# Altium PCB project.PcbDoc
Units mm, origin at the board's own origin, x right, y up, seen from the top; angles counter-clockwise.
Board outline 131 x 87 mm, 2 copper layers (Top Layer, Bottom Layer); 61 components, 46 nets, 223 pads, 89 vias.
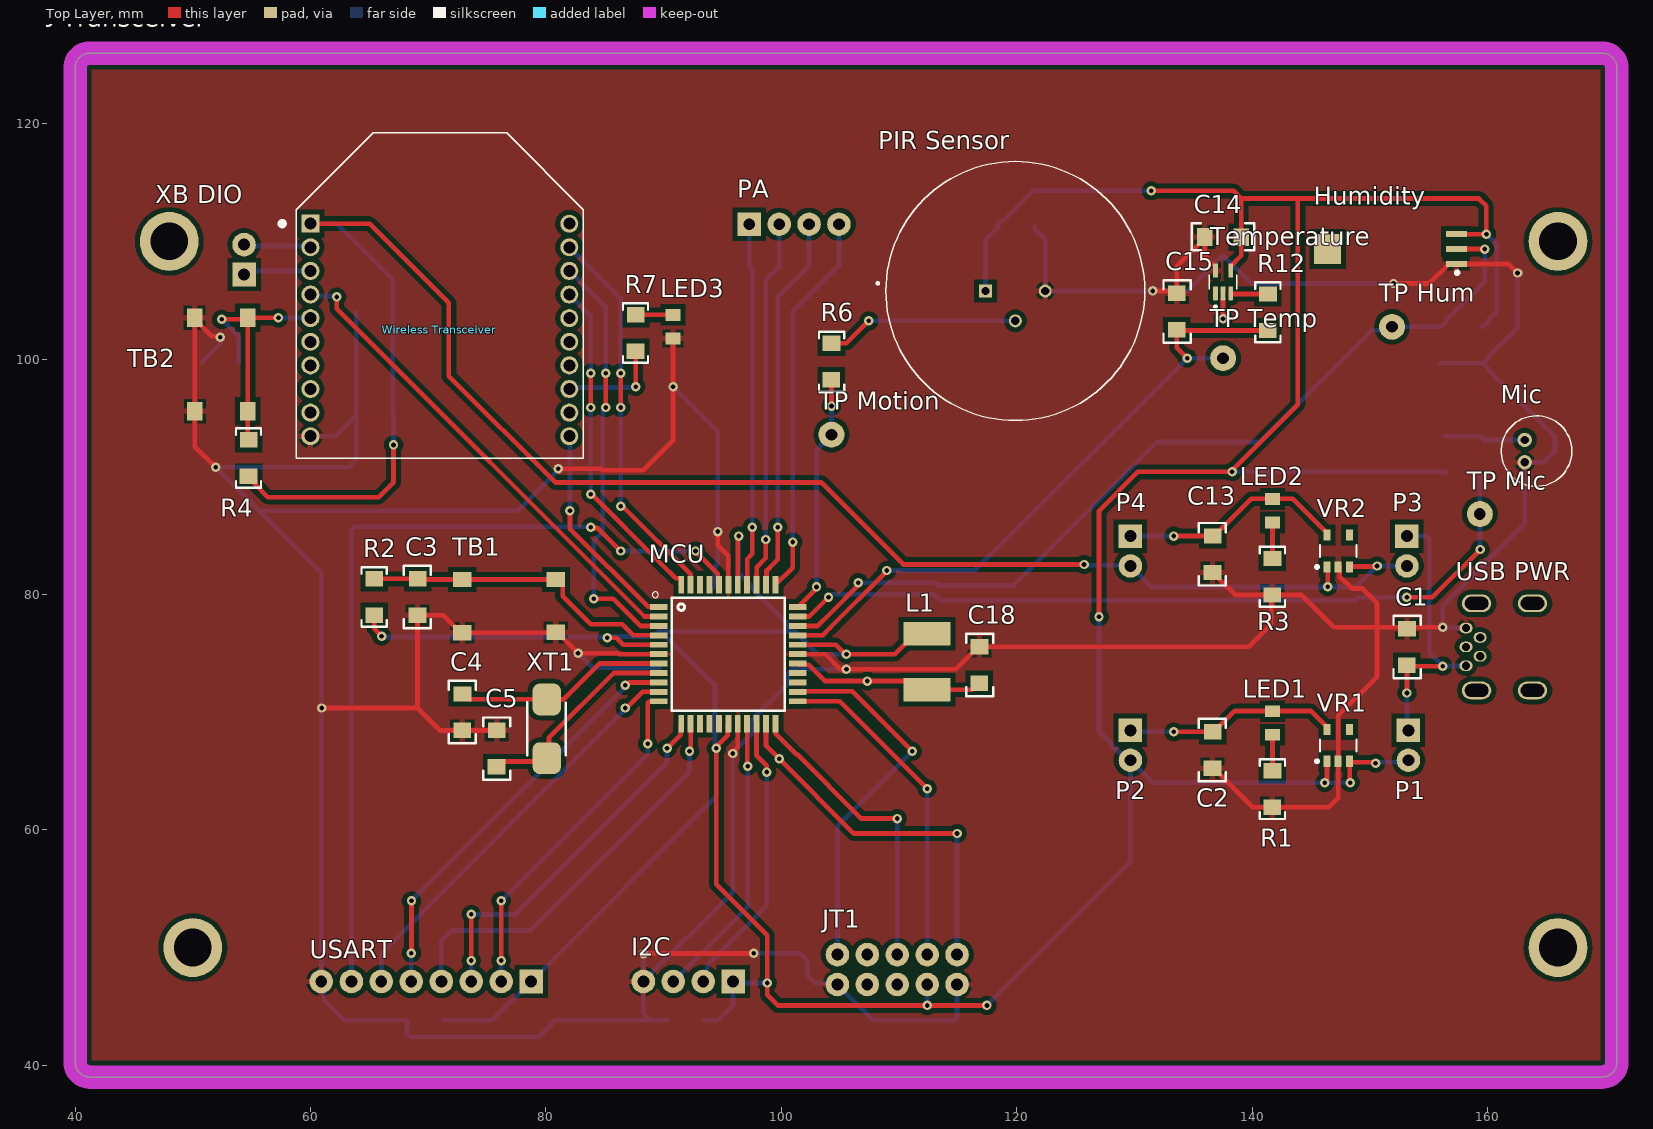
[diagram p0: Top Layer view]
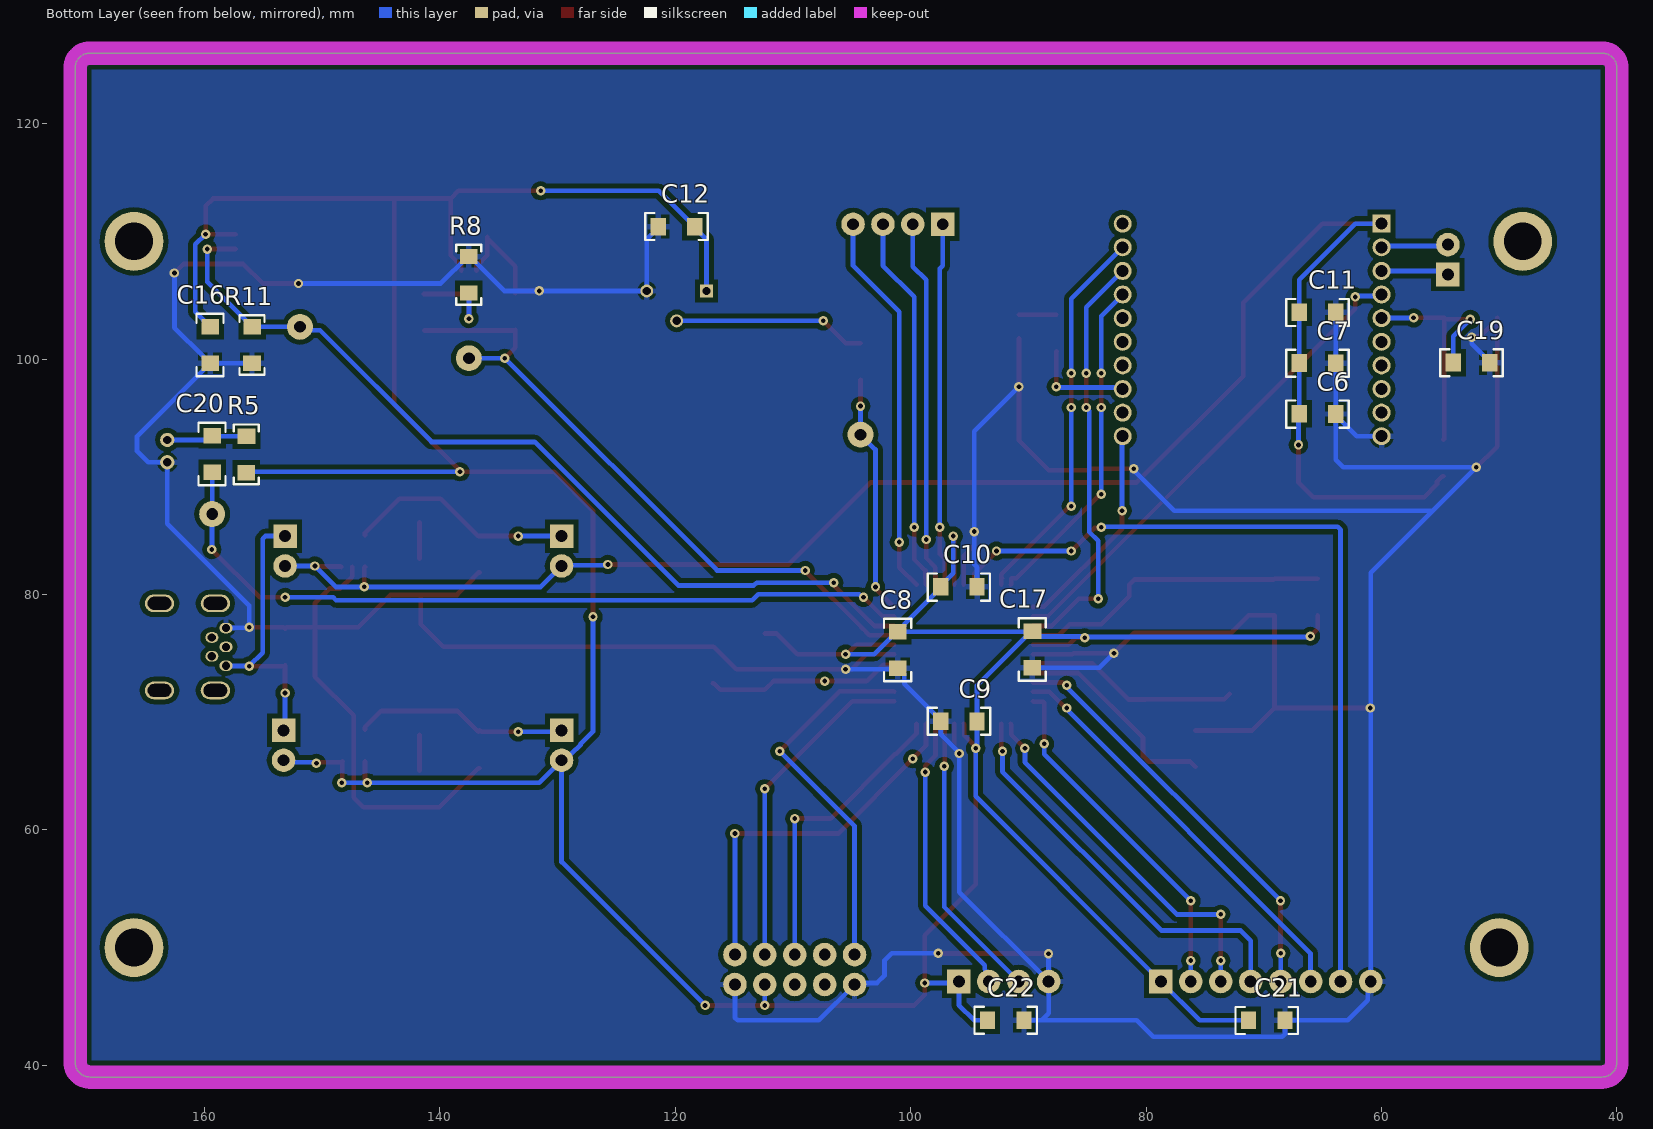
[diagram p1: Bottom Layer view, seen from below]

## Layer stack, top to bottom
Top Solder: solder mask 0.0102, Solder Resist, Dk 3.5
Top Layer: signal copper 0.0356
Dielectric 1: dielectric 0.32, FR-4, Dk 4.8
Bottom Layer: signal copper 0.0356
Bottom Solder: solder mask 0.0102, Solder Resist, Dk 3.5

## Board outline
40,40.27 40,124.73 cw(c41.27,124.73) 41.27,126 169.73,126 cw(c169.73,124.73) 171,124.73 171,40.27 cw(c169.73,40.27) 169.73,39 41.27,39 cw(c41.27,40.27)

## Design rules (kind name [scope] priority, off if disabled: settings)
Clearance Clearance_1 [WithinRoom('mcu_room') or InComponent('VR1') or InComponent('VR2') or InComponent('USB PWR') or InComponent('Temperature')] p1: gap=0.4 ignorepadtopadclearanceinfootprint=FALSE except(0.25: Arc-Arc Arc-Track Arc-SMDPad Track-Track Track-SMDPad SMDPad-SMDPad THPad-THPad)
Clearance [All] p2: gap=0.4 ignorepadtopadclearanceinfootprint=FALSE
HoleSize [All] p1: absolutevalues=TRUE maxlimit=4 minlimit=0.025 maxpercent=80.000 minpercent=20.000
MinimumSolderMaskSliver [All] p1 off: minsoldermaskwidth=0.254
PolygonConnect PolygonConnect_1 [IsVia] p1: connectstyle=Direct reliefconductorwidth=0.254 reliefentries=4 polygonreliefangle="90 Angle" airgapwidth=0.254
PolygonConnect [All] p2: connectstyle=Relief reliefconductorwidth=0.5 reliefentries=4 polygonreliefangle="90 Angle" airgapwidth=0.254
RoomDefinition mcu_room [False] p1: confinementstyle=ConfineIn formatcopy=TRUE lockcomponents=FALSE outline 87.376,82.677 104.14,82.677 104.14,66.802 87.376,66.802
RoutingVias [All] p1: holewidth=0.4 width=0.8 viastyle="Through Hole" minholewidth=0.4 minwidth=0.8 maxholewidth=0.4 maxwidth=0.8
SilkToSilkClearance [All] p1 off: silktosilkclearance=0.254
SilkToSolderMaskClearance [IsPad] p1 off: minsilkscreentomaskgap=0.254 clearancetoexposedcopper=TRUE
SolderMaskExpansion [All] p1: expansion=0.102 istentingtop=FALSE
Width [All] p1: maxlimit=1 minlimit=0.4 preferedwidth=0.4
26 further rules are at their usual default settings.

## Components (designator, comment, footprint, x,y, rotation, side; value= is the part's Value field where it differs from the comment)
C1 "1206, capacitor" "1206, capasitor" 153.124,73.416 r270 top value=100n
C2 "1206, capacitor" "1206, capasitor" 136.678,68.901 r90 top value=10u
C3 "1206, capacitor" "1206, capasitor" 69.126,81.905 r90 top value=100n
C4 "1206, capacitor" "1206, capasitor" 72.936,72.126 r90 top value=10-12p
C5 "1206, capacitor" "1206, capasitor" 75.781,64.78 r270 top value=10-12p
C6 "1206, capacitor" "1206, capasitor" 67.564,95.377 r0 bottom value=10u
C7 "1206, capacitor" "1206, capasitor" 67.564,99.695 r0 bottom value=1u
C8 "1206, capacitor" "1206, capasitor" 101.066,77.41 r90 bottom value=100n
C9 "1206, capacitor" "1206, capasitor" 93.786,69.189 r180 bottom value=100n
C10 "1206, capacitor" "1206, capasitor" 98.034,80.683 r0 bottom value=100n
C11 "1206, capacitor" "1206, capasitor" 67.564,104.013 r0 bottom value=8.2p
C12 "1206, capacitor" "1206, capasitor" 117.767,111.214 r180 bottom value=100n
C13 "1206, capacitor" "1206, capasitor" 136.678,85.538 r90 top value=10u
C14 "1206, capacitor" "1206, capasitor" 139.662,110.337 r0 top value=100n
C15 "1206, capacitor" "1206, capasitor" 133.578,101.914 r270 top value=1n
C16 "1206, capacitor" "1206, capasitor" 159.486,103.318 r90 bottom value=100n
C17 "1206, capacitor" "1206, capasitor" 89.624,77.46 r90 bottom value=100n
C18 "1206, capacitor" "1206, capasitor" 116.802,71.892 r270 top value=100n
C19 "1206, capacitor" "1206, capasitor" 54.473,99.733 r0 bottom value=100n
C20 "1206, capacitor" "1206, capasitor" 159.319,94.065 r90 bottom value=1u
C21 "1206, capacitor" "1206, capasitor" 71.872,43.853 r0 bottom value=100n
C22 "1206, capacitor" "1206, capasitor" 94.047,43.864 r0 bottom value=100n
Humidity "HIH-5030-001" HONEYWELL_HIH-5030-001 152.019,109.347 r90 top
I2C "4x1 Pin Header" padFour_L 92.075,47.117 r180 top
JT1 "JTAG Connector" Atmel_JTAG 114.963,49.393 r180 top
L1 "Coil" "1812, coil" 112.395,74.295 r270 top value=10uH
LED1 "0805, LED" 0805_led 141.76,69.088 r90 top value="0805 LED"
LED2 "0805, LED" 0805_led 141.76,87.122 r90 top value="0805 LED"
LED3 "0805, LED" 0805_led 90.83,102.759 r90 top value="0805 LED"
MCU "ATMEGA1284P-AUR" QFP80P1200X1200X120-44N 95.504,74.93 r0 top
Mic "CMC-2742PBJ-A" CUI_CMC-2742PBJ-A 164.167,92.186 r180 top
P1 "1x2 Pin Header" 1x2HEADER 153.289,68.453 r0 top
P2 "1x2 Pin Header" 1x2HEADER 129.667,68.453 r0 top
P3 "1x2 Pin Header" 1x2HEADER 153.162,84.963 r0 top
P4 "1x2 Pin Header" 1x2HEADER 129.667,84.963 r0 top
PA "4x1 Pin Header" padFour_L 101.112,111.466 r0 top
"PIR Sensor" "EKMC1603112" TO254P2200H2020-3 119.888,105.791 r0 top
R1 "1206, resistor" 1206 141.735,61.64 r270 top value=4.7k
R2 "1206, resistor" 1206 65.402,81.616 r90 top value=10k
R3 "1206, resistor" 1206 141.735,79.674 r270 top value=4.7k
R4 "1206, resistor" 1206 54.734,93.427 r90 top value=10k
R5 "1206, resistor" 1206 156.45,93.727 r90 bottom value=2.2k
R6 "1206, resistor" 1206 104.27,97.962 r270 top value=33k
R7 "1206, resistor" 1206 87.616,104.045 r90 top value=1.2k
R8 "1206, resistor" 1206 137.555,108.998 r90 bottom value=0R
R11 "1206, resistor" 1206 155.97,103.029 r90 bottom value=65k
R12 "1206, resistor" 1206 141.354,102.153 r270 top value=1k
TB1 "Tactile Button" "Button smd" 80.848,76.78 r180 top value="Button SMD"
TB2 "Tactile Button" "Button smd" 50.177,95.567 r90 top value="Button SMD"
Temperature "LMT88DCKR" SOT65P210X110-5N 137.541,106.553 r90 top
"TP Hum" "Test Point" testPoint 151.892,102.743 r90 top value="Test point"
"TP Mic" "Test Point" testPoint 159.357,86.836 r270 top value="Test point"
"TP Motion" "Test Point" testPoint 104.267,93.582 r180 top value="Test point"
"TP Temp" "Test Point" testPoint 137.541,100.076 r90 top value="Test point"
USART "1x8 Pin Header" "1x8 Pin HEader" 78.74,47.092 r180 top
"USB PWR" "USB Mini Connector" "USB Mini TH" 159.08,79.248 r270 top
VR1 "3.3V Reg" SOT23-5 147.32,67.183 r90 top value=TPS79333DBVR
VR2 "" SOT23-5 147.32,83.693 r90 top value=TPS79333DBVR
"Wireless Transceiver" "XB3-24Z8PT-J" XCVR_XB3-24Z8PT-J 70.993,105.41 r0 top
"XB DIO" "1x2 Pin Header" padtwo_L 54.356,107.188 r180 top
XT1 "XTAL TXC 7A" XTAL_SMD_LP 80.071,71.095 r270 top value=Crystal

## Footprints (in the part's own frame and the unit in brackets; to place one, negate y for a bottom-side part, rotate by r counter-clockwise, add the part's x,y. Pads: shape width x height; smd on the part's side, far side on the other; paste and mask are expansions set on the pad)
1x2HEADER [mm] "Pad Diameter 2 mm, Hole  1 mm, Pitch 2.54 mm"
  rect 2x2 hole 1: 1(0,0)
  round 2 hole 1: 2(0,-2.54)
  body extent -1.27,-3.81 1.27,1.27, height 5.94
"1x8 Pin HEader" [mm]
  rect 2x2 hole 1: 1(0,-0.025)
  round 2 hole 1: 2(2.54,-0.025) 3(5.08,-0.025) 4(7.62,-0.025) 5(10.18,-0.025) 6(12.72,-0.025) 7(15.26,-0.025) 8(17.82,-0.025)
  body extent -1.27,-1.24 19.05,1.24, height 8.54
0805_led [mm]
  rect 1x1.25 smd: 0(-1,0.025) 1(1,0.025)
  body extent -1.03,-0.6 0.99,0.65, height 1.1
1206 [mm] "Generic 1206"
  rect 1.3x1.5 smd: 0(-3.384,-0.003) 1(-0.286,-0.014)
  silkscreen extent -4.37,-1.07 0.71,1.07, body extent -3.46,-0.79 -0.26,0.81
"1206, capasitor" [mm] "Generic 1206"
  rect 1.3x1.5 smd: 0(-3.673,0.038) 1(-0.575,0.026)
  silkscreen extent -4.78,-1.1 0.53,1.2, body extent -3.78,-0.79 -0.58,0.81
"1812, coil" [mm]
  rect 2x4 smd: 1(-2.385,0) 2(2.385,0)
  body extent -2.3,-1.6 2.3,1.6, height 2.6
Atmel_JTAG [mm]
  round 2 hole 1: 1(0.028,-0.01) 2(0.028,2.53) 3(2.568,-0.01) 4(2.568,2.53) 5(5.108,-0.01) 6(5.108,2.53) 7(7.648,-0.01) 8(7.648,2.53) 9(10.188,-0.01) 10(10.188,2.53)
  body extent -1.15,-1.36 11.55,3.64, height 8.6
"Button smd" [mm]
  rect 1.55x1.3 smd: 1(0,0) 2(0,-4.5) 3(7.95,0.023) 4(7.95,-4.5)
  body extent -0.55,-5.25 8.45,0.75, height 4.3
CUI_CMC-2742PBJ-A [mm]
  round 1.208 hole 0.7: GND(1,0.95) OUT(1,-0.95)
  silkscreen extent -3,-3 3,3
HONEYWELL_HIH-5030-001 [mm]
  rect 0.51x1.78 smd: 1(-1.27,-5.335) 2(0,-5.335) 3(1.27,-5.335)
  rect 2.54x2.29 smd: 4(0,5.59)
  silkscreen extent -2.14,-5.54 -1.86,-5.26
padFour_L [mm] "Pad Diameter 2 mm, Hole  0.3 mm, Pitch 2.54 mm"
  rect 2x2 hole 1: 1(-3.83,0)
  round 2 hole 1: 2(-1.29,0) 3(1.25,0) 4(3.79,0)
  body extent -5.1,-1.42 5.06,1.5, height 8.51
padtwo_L [mm] "Pad Diameter 2 mm, Hole  0.3 mm, Pitch 2.54 mm"
  rect 2x2 hole 1: 1(0,0)
  round 2 hole 1: 2(0,-2.54)
  body extent -1.46,-3.81 1.46,1.27, height 8.51
QFP80P1200X1200X120-44N [mm]
  rect 1.5x0.5 smd: 1(-5.9,4) 2(-5.9,3.2) 3(-5.9,2.4) 4(-5.9,1.6) 5(-5.9,0.8) 6(-5.9,0) 7(-5.9,-0.8) 8(-5.9,-1.6) 9(-5.9,-2.4) 10(-5.9,-3.2) 11(-5.9,-4) 23(5.9,-4) 24(5.9,-3.2) 25(5.9,-2.4) 26(5.9,-1.6) 27(5.9,-0.8) 28(5.9,0) 29(5.9,0.8) 30(5.9,1.6) 31(5.9,2.4) 32(5.9,3.2) 33(5.9,4)
  rect 0.5x1.5 smd: 12(-4,-5.9) 13(-3.2,-5.9) 14(-2.4,-5.9) 15(-1.6,-5.9) 16(-0.8,-5.9) 17(0,-5.9) 18(0.8,-5.9) 19(1.6,-5.9) 20(2.4,-5.9) 21(3.2,-5.9) 22(4,-5.9) 34(4,5.9) 35(3.2,5.9) 36(2.4,5.9) 37(1.6,5.9) 38(0.8,5.9) 39(0,5.9) 40(-0.8,5.9) 41(-1.6,5.9) 42(-2.4,5.9) 43(-3.2,5.9) 44(-4,5.9)
  silkscreen extent -6.45,-4.8 4.8,5.3
SOT23-5 [mm] "SOT23, 5-Leads, Body 2,90x2,80mm, Pitch 0,95mm, IPC Medium Density"
  rect 0.95x0.6 smd: 1(-1.35,0.95) 2(-1.35,0) 3(-1.35,-0.95) 4(1.35,-0.95) 5(1.35,0.95)
  silkscreen extent -1.47,-1.55 0.5,1.92, body extent -1.25,-1.5 1.25,1.5, height 1.1
SOT65P210X110-5N [mm]
  rrect25% 1.19x0.4 smd: 1(-0.96,0.65) 2(-0.96,0) 3(-0.96,-0.65) 4(0.96,-0.65) 5(0.96,0.65)
  silkscreen extent -2.2,-1.17 0.63,1.17
testPoint [mm] "Diameter 2mm, Hole 0.3mm"
  round 2.2 hole 1: 0(0,0)
  body extent -1.27,-1.31 1.27,1.32, height 4.36
TO254P2200H2020-3 [mm]
  rect 1.1x1.1 hole 0.7: 1(-2.54,0)
  round 1.1 hole 0.7: 2(0,-2.54) 3(2.54,0)
  silkscreen extent -11.78,-11 11,11
"USB Mini TH" [mm]
  oval 0.9x1.1 hole 0.7: 1(5.3,-0.9) 2(4.5,0.3) 3(3.7,-0.9) 4(2.9,0.3) 5(2.1,-0.9)
  oval 1.5x2.5 hole 1.1 slot 2 at 90 deg: 6(0,4.75) 6(0,0) 6(7.4,4.75) 6(7.4,0)
  body extent -0.37,-1.02 7.78,7.8, height 3.95
XCVR_XB3-24Z8PT-J [mm]
  rect 1.53x1.53 hole 1.02: 1(-10.998,6.096)
  round 1.53 hole 1.02: 2(-10.998,4.089) 3(-10.998,2.083) 4(-10.998,0.076) 5(-10.998,-1.93) 6(-10.998,-3.937) 7(-10.998,-5.944) 8(-10.998,-7.95) 9(-10.998,-9.957) 10(-10.998,-11.963) 11(10.998,-11.963) 12(10.998,-9.957) 13(10.998,-7.95) 14(10.998,-5.944) 15(10.998,-3.937) 16(10.998,-1.93) 17(10.998,0.076) 18(10.998,2.083) 19(10.998,4.089) 20(10.998,6.096)
  silkscreen extent -13.6,-13.82 12.19,13.82
XTAL_SMD_LP [mm] "Pad 1.7x2.4, Pitch 3.7"
  rrect50% 2.7x2.4 smd: 1(0.02,0) 2(5,0)
  silkscreen extent 0.26,-1.66 4.76,1.62, body extent 0.02,-1.6 5.02,1.6, height 1.35

## Part data
Humidity: "Humidity Temperature Sensor 0 ~ 100% RH Analog Voltage Â±3% RH 5s Surface Mount", Package="Housed Sensor Honeywell Sensing", Digi-Key_Part_Number=480-3294-1-ND, Digi-Key_Purchase_URL=https://www.digikey.com/product-detail/en/honeywell-sensing-and-productivity-solutions/HIH-5030-001/480-3294-1-ND/2061078?utm_source=snapeda&utm_medium=aggregator&utm_campaign=symbol, MF="Honeywell Sensing", MP=HIH-5030-001, SnapEDA_Link=https://www.snapeda.com/parts/HIH-5030-001/Honeywell%20Sensing%20and%20Productivity%20Solutions/view-part/269223/?ref=snap
I2C PA: library part "1x4 Pin Header", "2.54 mm"
JT1: library part "Atmel JTAG", "Atmel JTAG Connector"
MCU: "AVR AVRÂ® ATmega Microcontroller IC 8-Bit 20MHz 128KB (64K x 16) FLASH 44-TQFP (10x10)", Package="TQFP-44 Microchip", Availability=Warning, MF=Microchip, Mouser-Purchase-URL=https://snapeda.com/shop?store=Mouser&id=1775205, MP=ATMEGA1284P-AUR, Price=None, SnapEDA_Link=https://www.snapeda.com/parts/ATMEGA1284P-AUR/Microchip/view-part/1775205/?ref=snap
Mic: "6.0 mm, Omnidirectional, PCB Mount, 2.0 Vdc, Electret Condenser Microphone", Package=None, Availability=Unavailable, MP=CMC-2742PBJ-A, Price=None
P1 P2 P3 P4 "XB DIO": "2.54 mm, TH"
"PIR Sensor": "Sensor PIR _Passive Infrared_ 472 _12m_ 39.4' Polyethylene, Black Lens", Package="- Panasonic Electric", Availability=Unavailable, MF="Panasonic Electric", MP=EKMC1603112, Price=None, SnapEDA_Link=https://www.snapeda.com/parts/EKMC1603112/Panasonic%20Electric%20Works/view-part/82446/?ref=snap
R1 R2 R3 R4 R5 R6 R7 R8 R11 R12: "Resistor"
TB1 TB2: library part "Button SMD", "Tactile Switch Small Low", ELFA=110-87-406
Temperature: "&plusmn;4&deg;C analog output temperature sensor, with -11.77mV/&deg;C gain 5-SC70 -55 to 130", Package=None, Availability=Unavailable, MP=LMT88DCKR, Price=None
USART: "2.54 mm"
VR1: library part TPS79333DBR, "3.3V Reg, Ultra-Low Noise, 200 mA", Input Voltage="Vin 6V (max)", Drop Out=102mV, Farnell=1287689
VR2: library part TPS79333DBR, "3.3V Reg, Ultra-Low Noise, 200 mA", Drop Out=102mV, Farnell=1287689
"Wireless Transceiver": "802.15.4 ZigbeeÂ® Transceiver Module 2.4GHz Integrated, Trace Through Hole", Package="Module Digi International", Digi-Key_Part_Number=602-2188-ND, Digi-Key_Purchase_URL=https://www.digikey.ch/product-detail/en/digi/XB3-24Z8PT-J/602-2188-ND/8130934?utm_source=snapeda&utm_medium=aggregator&utm_campaign=symbol, MF="Digi International", MP=XB3-24Z8PT-J, SnapEDA_Link=https://www.snapeda.com/parts/XB3-24Z8PT-J/Digi%20International/view-part/2751315/?ref=snap
XT1: "16 MHz, SMD, 5mm x 3,2mm, 30 ppm", Farnell=1841946
"TP Hum" "TP Mic" "TP Motion" "TP Temp": Farnell=1702006
"USB PWR": Farnell=1125348

## Free pads (board coordinates)
  round 5 hole 3.2: 2(48,110) 2(50,50) 2(166,50) 2(166,110)

## Via types
v1: diameter 0.8, hole 0.4, Top Layer to Bottom Layer, 89 vias

## Nets (pads, with @x,y where several pads share a name; then routed paths per layer and width w, separated by ;. In a path a pad name is that pad's centre, name@x,y a point inside that pad or via, vN(x,y) a via of type N, cw(c..) or ccw(c..) an arc to the next point about the centre after c; other vN are vias at no path point)
3V3: "PIR Sensor.1" C8.1 C9.1 C10.1 C12.1 C14.1 C16.1 C17.1 C21.1 C22.1 Humidity.3 I2C.1 JT1.4 L1.1 MCU.5 MCU.17 MCU.29 MCU.38 P1.2 P2.2 R2.0 R5.0 Temperature.4 USART.1 VR1.1 VR1.3 | length 377.1
  Top Layer w0.4: R2.0 65.405,77.089 v1(66.04,76.454) ; v1(85.217,76.327) 85.979,76.327 86.576,75.73 87.376,75.73 MCU.5 ; MCU.17 95.454,68.98 95.454,68.038 94.488,67.072 v1(94.488,66.929) 94.488,55.372 98.806,51.054 v1(98.806,46.99) 98.806,45.974 99.695,45.085 v1(112.395,45.085) v1(117.475,45.085) ; MCU.38 96.304,84.874 v1(96.393,84.963) ; MCU.29 104.14,75.73 104.61,75.73 105.333,75.007 105.46,75.007 v1(105.537,74.93) 109.645,74.93 111.395,76.68 L1.1 ; v1(127,78.105) 127,87.122 130.302,90.424 v1@138.176,90.424 ; v1(131.445,114.3) 138.43,114.3 139.086,113.644 ; Temperature.4 138.191,107.908 139.086,108.803 C14.1 139.086,113.644 ; v1@138.239,90.487 143.891,96.139 143.891,113.644 ; v1(146.177,64.008) 146.37,64.201 VR1.1 ; VR1.3 VR1.3@148.303,65.8 ; v1(148.336,64.008) 148.303,64.041 VR1.3@148.303,65.8 ; v1(150.495,65.659) 150.418,65.736 148.367,65.736 VR1.3@148.303,65.8 ; Humidity.3 v1(159.914,110.617) 159.893,110.638 159.893,113.03 159.279,113.644 143.891,113.644 ; 139.086,113.644 143.891,113.644
  Bottom Layer w0.4: v1(66.04,76.454) 66.103,76.391 85.153,76.391 v1(85.217,76.327) 85.325,76.327 85.433,76.435 89.201,76.435 C17.1 89.701,76.835 C17.1@89.801,76.835 ; C21.1 75.449,43.826 USART.1 94.488,62.865 v1(94.488,66.929) 94.361,67.056 C9.1 94.361,72.275 C17.1@89.801,76.835 ; C22.1 93.494,43.815 94.615,43.815 95.905,45.105 I2C.1 96.032,46.99 v1(98.806,46.99) ; v1(96.393,84.963) 96.393,81.822 97.459,80.756 C10.1 97.459,80.556 100.542,77.473 100.542,77.285 C8.1@100.992,76.835 ; v1(105.537,74.93) 103.097,74.93 101.192,76.835 C8.1 C8.1@100.992,76.835 ; v1(112.395,45.085) JT1.4 ; 117.348,105.791 117.348,110.146 118.343,111.141 118.441,111.141 C12.1@118.441,111.241 ; v1(117.475,45.085) 129.667,57.277 P2.2 ; C12.1 118.343,111.341 118.793,111.791 118.893,111.791 121.402,114.3 v1(131.445,114.3) ; v1(127,78.105) 127,68.326 128.067,67.259 128.067,67.204 128.418,66.853 128.473,66.853 129.413,65.913 P2.2 ; v1(138.303,90.424) 156.365,90.424 R5.0 ; v1(148.336,64.008) v1(146.177,64.008) 131.572,64.008 P2.2 ; v1(150.495,65.659) 150.572,65.736 153.112,65.736 P1.2 ; C16.1 159.612,102.743 160.062,103.193 160.062,103.293 160.782,104.013 160.782,109.749 v1(159.914,110.617) ; C17.1@89.801,76.835 C8.1@100.992,76.835
GND: "PIR Sensor.3" "USB PWR.5" "Wireless Transceiver.10" C1.0 C2.0 C3.0 C4.0 C5.0 C6.0 C7.0 C8.0 C9.0 C10.0 C11.0 C12.0 C13.0 C14.0 C15.0 C16.0 C17.0 C18.0 C19.0 C21.0 C22.0 Humidity.1 I2C.4 JT1.2 JT1.10 LED3.0 MCU.6 MCU.18 MCU.28 MCU.39 Mic.GND R1.1 R3.1 R8.1 R11.0 TB1.1 TB1.3 TB2.1 TB2.3 Temperature.5 USART.8 VR1.2 VR2.2 | length 537.6
  Top Layer w0.4: TB2.3 50.155,103.392 TB2.3@50.177,103.37 ; v1(51.943,90.805) 50.177,92.571 TB2.1 TB2.3@50.177,103.37 ; v1(52.324,101.854) 52.247,101.931 51.616,101.931 TB2.3@50.177,103.37 ; v1(60.96,70.358) 69.088,70.358 ; C5.0 C4.0 70.993,68.453 69.088,70.358 ; v1(81.042,90.679) 84.644,90.679 84.772,90.551 88.265,90.551 90.805,93.091 v1(90.805,97.663) LED3.0 ; v1(88.294,49.476) 88.321,49.503 97.636,49.503 v1(97.663,49.53) ; MCU.6 87.376,74.93 86.245,74.93 86.157,75.018 v1(82.735,75.018) 80.995,76.757 TB1.3 72.773,76.757 71.298,78.232 C3.0 69.088,70.358 ; v1(94.615,85.344) 94.615,84.201 95.504,83.312 MCU.39 ; v1(95.885,66.489) 95.962,66.565 95.962,66.684 96.08,66.802 96.304,67.026 MCU.18 ; MCU.28 103.759,74.93 105.029,73.66 v1(105.537,73.66) 114.835,73.66 116.74,75.565 C18.0 139.713,75.565 141.621,77.473 R3.1@141.621,79.96 ; v1(131.572,105.791) 133.411,105.791 C15.0 133.615,107.9 C14.0@135.989,110.274 ; C14.0 C14.0@135.989,110.274 ; C2.0 136.741,65.228 140.043,61.926 R1.1 146.508,61.926 147.32,62.738 VR1.2 147.32,69.723 150.622,73.025 150.622,77.216 ; C13.0 136.741,81.865 137.191,81.415 137.191,81.324 138.555,79.96 R3.1@141.621,79.96 ; Temperature.5 136.891,107.908 135.989,108.81 C14.0@135.989,110.274 ; VR2.2@147.447,82.343 147.454,82.336 147.454,81.527 148.463,80.518 149.352,80.518 149.773,80.097 149.773,80.092 150.622,79.243 150.622,77.216 ; v1(152.019,106.426) 155.068,106.426 156.719,108.077 Humidity.1 161.798,108.077 v1(162.56,107.315) ; v1(156.21,77.216) 153.289,77.216 C1.0 153.035,77.216 150.622,77.216 ; R3.1@141.621,79.96 144.195,79.96 146.939,77.216 150.622,77.216
  Bottom Layer w0.4: C19.0 50.8,99.795 52.324,101.319 v1(52.324,101.854) ; 59.995,93.447 62.098,93.447 C6.0@63.881,95.23 ; C11.0 C7.0 C6.0 63.891,95.239 C6.0@63.881,95.23 ; v1(81.042,90.679) 81.042,90.567 77.597,87.122 55.626,87.122 ; v1(82.735,75.018) 83.966,73.787 C17.0 ; v1(88.294,49.476) 88.29,49.472 I2C.4@88.29,47.122 ; v1(90.805,97.663) 94.615,93.853 v1(94.615,85.344) 94.615,82.55 94.361,82.296 C10.0 ; v1(97.663,49.53) 101.6,49.53 102.235,48.895 102.235,47.625 102.87,46.99 104.648,46.99 JT1.10 107.823,43.815 114.701,43.815 114.935,44.049 JT1.2 ; v1(105.537,73.66) 101.18,73.66 C8.0 101.003,73.737 100.553,73.287 100.553,72.42 97.459,69.326 C9.0 97.447,69.215 97.447,68.11 95.885,66.548 95.885,54.717 I2C.4@88.29,47.122 ; C12.0@121.539,111.252 121.539,111.053 122.428,110.164 122.428,105.791 v1(131.572,105.791) 134.52,105.791 137.441,108.712 R8.1 137.641,108.712 139.927,106.426 v1(152.019,106.426) ; R11.0 C16.0 C16.0@159.623,99.645 ; v1@156.21,77.182 158.146,77.182 158.18,77.148 ; v1(156.21,77.216) 156.21,79.057 163.167,86.015 Mic.GND 164.788,91.236 165.735,92.182 165.735,93.433 160.073,99.095 160.073,99.195 C16.0@159.623,99.645 ; v1(162.56,107.315) 162.56,102.682 160.073,100.195 160.073,100.095 C16.0@159.623,99.645 ; 55.626,87.122 60.92,81.828 60.92,70.358 USART.8 61.163,46.874 61.163,45.517 62.865,43.815 C21.0 68.199,42.652 68.433,42.418 79.39,42.418 80.787,43.815 88.889,43.815 90.363,43.815 C22.0 88.889,43.826 88.285,44.43 I2C.4 I2C.4@88.29,47.122 ; 55.626,87.122 v1(51.943,90.805) 63.246,90.805 63.881,91.44 C6.0@63.881,95.23
Humidity: "TP Hum.0" Humidity.2 MCU.31 R11.1 | length 76.1
  Top Layer w0.4: MCU.31 103.111,77.33 104.14,78.359 106.553,80.772 v1(106.553,81.01) ; Humidity.2 v1(159.766,109.347)
  Bottom Layer w0.4: v1(106.553,81.01) 113.092,81.01 113.33,80.772 119.761,80.772 131.953,92.964 140.716,92.964 150.192,102.44 151.589,102.44 151.892,102.743 R11.1 156.056,102.743 156.506,103.193 156.506,103.293 159.766,106.553 v1(159.766,109.347)
Mic: "TP Mic.0" C20.0 MCU.32 | length 67.3
  Top Layer w0.4: MCU.32 102.387,78.13 v1(104.013,79.756) ; v1(153.162,79.756) 155.321,79.756 v1(159.385,83.82)
  Bottom Layer w0.4: v1(104.013,79.756) 104.121,79.756 104.14,79.775 104.375,80.01 112.961,80.01 113.469,79.502 148.832,79.502 149.086,79.756 v1(153.162,79.756) ; C20.0 159.357,86.836 159.371,86.822 159.371,83.834 v1(159.385,83.82)
Motion: "TP Motion.0" MCU.33 R6.1 | length 20.5
  Top Layer w0.4: MCU.33 102.997,80.523 v1(102.997,80.645) ; R6.1 104.267,98.237 v1(104.267,96.012)
  Bottom Layer w0.4: v1(102.997,80.645) 102.997,92.312 104.267,93.582 104.267,93.599 v1(104.267,96.012)
NetC1_1: "USB PWR.1" C1.1 P1.1 P3.1 | length 24
  Top Layer w0.4: C1.1 C1.1@153.162,73.98 ; v1(153.162,71.628) C1.1@153.162,73.98 ; v1(156.21,73.914) 153.228,73.914 C1.1@153.162,73.98
  Bottom Layer w0.4: v1(153.162,71.628) 153.162,68.58 P1.1 ; P3.1 154.833,84.963 155.067,84.729 155.067,75.057 v1@156.193,73.931 ; v1(156.21,73.914) v1@156.193,73.931 ; 158.18,73.948 158.163,73.931 v1@156.193,73.931
NetC2_1: C2.1 LED1.1 P2.1 VR1.5 | length 18.4
  Top Layer w0.4: v1(133.35,68.326) 136.498,68.326 136.625,68.453 136.752,68.326 138.53,70.104 141.719,70.104 LED1.1 141.751,70.104 144.974,70.104 146.37,68.708 VR1.5
  Bottom Layer w0.4: P2.1 129.794,68.326 v1(133.35,68.326)
NetC13_1: C13.1 LED2.1 P4.1 VR2.5 | length 19.4
  Top Layer w0.4: v1(133.35,84.963) C13.1 136.752,84.963 139.927,88.138 143.45,88.138 146.37,85.218 VR2.5
  Bottom Layer w0.4: P4.1 v1(133.35,84.963)
NetC18_1: C18.1 L1.2 MCU.27 | length 16.6
  Top Layer w0.4: MCU.27 101.504,74.03 102.34,74.03 103.726,72.644 v1(107.315,72.644) 111.661,72.644 L1.2 116.172,71.91 116.729,72.467 C18.1
NetC20_1: C20.1 Mic.OUT R5.1 | length 6.9
  Bottom Layer w0.4: R5.1 159.296,93.44 C20.1 159.7,93.136 Mic.OUT
NetLED1_0: LED1.0 R1.0 | length 3.1
  Top Layer w0.4: R1.0 141.735,65.027 LED1.0
NetLED2_0: LED2.0 R3.0 | length 3.1
  Top Layer w0.4: R3.0 141.735,83.061 LED2.0
NetLED3_1: LED3.1 R7.1 | length 3.2
  Top Layer w0.4: R7.1 LED3.1
"NetPIR Sensor_2": "PIR Sensor.2" R6.0 | length 16.6
  Top Layer w0.4: R6.0 105.537,101.346 v1(107.442,103.251)
  Bottom Layer w0.4: v1@107.505,103.188 v1(107.442,103.251) 119.888,103.251 119.825,103.188
NetR8_0: R8.0 Temperature.2 | length 3.8
  Top Layer w0.4: v1(137.541,103.439) Temperature.2@137.541,105.071
  Bottom Layer w0.4: v1(137.541,103.439) 137.541,105.603 R8.0
NetR12_0: R12.0 Temperature.3 | length 3.2
  Top Layer w0.4: Temperature.3 138.191,105.537 R12.0
PA0: MCU.37 PA.1 | length 30.9
  Top Layer w0.4: MCU.37 97.104,83.016 97.536,83.448 97.536,84.328 v1(97.536,85.725)
  Bottom Layer w0.4: PA.1 97.282,107.95 97.536,107.696 v1(97.536,85.725)
PA1: MCU.36 PA.2 | length 31.4
  Top Layer w0.4: MCU.36 97.904,81.661 97.917,81.674 97.917,82.326 98.692,83.101 v1(98.692,84.671)
  Bottom Layer w0.4: v1(98.692,84.671) 98.692,106.723 99.822,107.854 PA.2
PA2: MCU.35 PA.3 | length 32.2
  Top Layer w0.4: MCU.35 98.704,81.33 98.754,81.38 98.754,82.032 99.399,82.677 99.695,82.973 v1(99.695,85.725)
  Bottom Layer w0.4: v1(99.695,85.725) 99.695,105.283 102.362,107.95 PA.3
PA3: MCU.34 PA.4 | length 32.9
  Top Layer w0.4: MCU.34 100.965,82.291 v1(100.965,84.455)
  Bottom Layer w0.4: v1(100.965,84.455) 100.965,104.013 104.902,107.95 PA.4
RESET: C3.1 MCU.4 R2.1 TB1.2 TB1.4 | length 26.7
  Top Layer w0.4: R2.1 C3.1 69.149,81.28 TB1.4 TB1.2 80.973,81.28 81.423,80.83 81.423,79.867 83.82,77.47 86.488,77.47 87.428,76.53 MCU.4
SCL: I2C.3 MCU.19 | length 24.6
  Top Layer w0.4: MCU.19 97.104,66.802 97.104,65.456 v1(97.155,65.405)
  Bottom Layer w0.4: I2C.3 97.155,53.447 v1(97.155,65.405)
SDA: I2C.2 MCU.20 | length 24.5
  Top Layer w0.4: MCU.20 97.904,66.802 97.904,66.307 98.768,65.443 v1(98.768,64.91)
  Bottom Layer w0.4: I2C.2 93.671,47.423 93.671,48.123 93.699,48.151 93.699,48.487 98.768,53.556 v1(98.768,64.91)
SPI_ATN: "Wireless Transceiver.19" MCU.43 | length 33.1
  Top Layer w0.4: v1(86.36,87.503) 86.437,87.426 86.595,87.426 92.304,81.717 MCU.43@92.304,81.33 ; v1(86.36,95.885) v1(86.36,98.806) ; MCU.43@92.254,81.38 MCU.43@92.304,81.33 ; MCU.43 MCU.43@92.304,81.33
  Bottom Layer w0.4: 81.991,109.499 86.36,105.131 v1(86.36,98.806) ; v1(86.36,87.503) v1(86.36,95.885)
SPI_CLK: "Wireless Transceiver.18" MCU.3 | length 36.1
  Top Layer w0.4: v1(84.074,79.629) 85.725,79.629 88.024,77.33 MCU.3 ; v1(85.09,95.885) v1(85.09,98.806)
  Bottom Layer w0.4: 81.991,107.493 85.09,104.394 v1(85.09,98.806) ; v1(84.074,79.629) 84.074,84.565 84.82,85.311 84.82,95.615 v1(85.09,95.885)
SPI_MISO: "Wireless Transceiver.4" MCU.2 | length 41.5
  Top Layer w0.4: v1(62.23,105.283) 62.23,104.279 88.379,78.13 MCU.2
  Bottom Layer w0.4: 59.995,105.486 60.121,105.36 62.153,105.36 v1(62.23,105.283)
SPI_MOSI: "Wireless Transceiver.11" MCU.1 | length 18.2
  Top Layer w0.4: v1(82.042,87.122) 82.042,85.598 88.685,78.955 89.579,78.955 MCU.1
  Bottom Layer w0.4: 81.991,93.447 82.042,93.396 v1(82.042,87.122)
SPI_SEL: "Wireless Transceiver.17" MCU.44 | length 28.9
  Top Layer w0.4: v1(83.82,88.519) 83.883,88.519 89.725,82.677 91.022,81.38 91.454,81.38 91.454,80.88 MCU.44 ; v1(83.82,95.885) v1(83.82,98.806)
  Bottom Layer w0.4: 81.991,105.486 83.82,103.657 v1(83.82,98.806) ; v1(83.82,88.519) v1(83.82,95.885)
TCK: JT1.1 MCU.21 | length 31.5
  Top Layer w0.4: MCU.21 98.704,67.158 99.06,66.802 v1(99.822,66.04) 106.172,59.69 v1(114.935,59.69)
  Bottom Layer w0.4: JT1.1 v1(114.935,59.69)
TDI: JT1.9 MCU.24 | length 31.8
  Top Layer w0.4: MCU.24 101.454,71.78 102.171,71.78 106.02,71.78 v1(111.125,66.675)
  Bottom Layer w0.4: JT1.9 104.775,60.325 v1(111.125,66.675)
TDO: JT1.3 MCU.23 | length 28.2
  Top Layer w0.4: MCU.23 104.965,70.93 v1(112.395,63.5)
  Bottom Layer w0.4: JT1.3 v1(112.395,63.5)
Temp.: "TP Temp.0" C15.1 MCU.30 R12.1 | length 56.5
  Top Layer w0.4: MCU.30 103.513,76.53 104.14,77.157 108.966,81.983 v1(108.966,82.042) ; v1(134.493,100.076) 133.604,100.965 C15.1 133.654,102.439 R12.1
  Bottom Layer w0.4: v1(108.966,82.042) 116.459,82.042 v1(134.493,100.076) 137.541,100.076
TMS: JT1.5 MCU.22 | length 25.7
  Top Layer w0.4: MCU.22 99.504,68.199 100.965,66.738 101.282,66.421 101.346,66.421 106.807,60.96 v1(109.855,60.96)
  Bottom Layer w0.4: JT1.5 v1(109.855,60.96)
USART0A: MCU.9 USART.5 | length 35.7
  Top Layer w0.4: v1(68.57,49.52) 68.58,49.53 v1(68.58,53.975) ; v1(86.741,72.279) 86.849,72.279 87.1,72.53 87.376,72.53 MCU.9
  Bottom Layer w0.4: USART.5 68.57,47.127 v1(68.57,49.52) ; v1(68.58,53.975) 86.741,72.136 v1(86.741,72.279)
USART0B: MCU.10 USART.6 | length 35.3
  Top Layer w0.4: v1(86.741,70.358) 86.868,70.358 88.24,71.73 MCU.10
  Bottom Layer w0.4: USART.6 66.04,47.137 66.04,49.53 86.741,70.231 v1(86.741,70.358)
USART0CLK: MCU.40 USART.7 | length 72.3
  Top Layer w0.4: v1(83.82,85.725) 83.897,85.648 84.405,85.648 v1(86.36,83.693) ; v1(92.71,83.693) 92.71,83.66 94.604,81.766 94.604,80.93 MCU.40
  Bottom Layer w0.4: USART.7 63.48,85.51 63.714,85.744 83.801,85.744 v1(83.82,85.725) ; v1(86.36,83.693) v1(92.71,83.693)
USART1A: MCU.11 USART.2 | length 29.8
  Top Layer w0.4: v1(76.2,48.895) v1(76.2,53.975) ; v1(88.646,67.31) 88.646,70.789 88.737,70.88 89.554,70.88 MCU.11
  Bottom Layer w0.4: USART.2 v1(76.2,48.895) ; v1(76.2,53.975) 88.646,66.421 v1(88.646,67.31)
USART1B: MCU.12 USART.3 | length 31.5
  Top Layer w0.4: v1(73.66,48.895) v1(73.66,52.832) ; v1(90.297,66.929) 91.454,68.086 91.454,68.98 MCU.12
  Bottom Layer w0.4: USART.3 v1(73.66,48.895) ; v1(73.66,52.832) 73.684,52.808 77.367,52.808 90.297,65.737 v1(90.297,66.929)
USART1CLK: MCU.13 USART.4 | length 34.6
  Top Layer w0.4: v1(92.204,66.673) 92.204,66.781 92.225,66.802 92.304,66.881 MCU.13
  Bottom Layer w0.4: USART.4 71.12,50.59 71.989,51.459 78.716,51.459 92.204,64.947 v1(92.204,66.673)
XAwake: "Wireless Transceiver.13" R7.0 | length 8.7
  Top Layer w0.4: R7.0 87.63,100.65 v1(87.63,97.663)
  Bottom Layer w0.4: 81.991,97.46 82.118,97.586 87.553,97.586 v1(87.63,97.663)
XB: "Wireless Transceiver.1" C6.1 C7.1 C11.1 P3.2 P4.2 R4.0 VR2.1 VR2.3 | length 154.2
  Top Layer w0.4: R4.0 54.837,90.043 55.287,89.593 55.287,89.366 56.388,88.265 65.786,88.265 67.056,89.535 v1(67.056,92.71) ; 59.995,111.506 65.024,111.506 71.755,104.775 71.755,98.552 80.788,89.519 103.394,89.519 110.363,82.55 v1(125.73,82.55) ; VR2.1 146.431,82.282 v1(146.431,80.656) ; VR2.3@148.397,82.343 148.437,82.383 150.582,82.383 v1(150.622,82.423)
  Bottom Layer w0.4: 59.995,111.506 62.23,111.506 66.989,106.747 C11.1 C7.1 C6.1 67.056,95.283 v1(67.056,92.71) ; v1(125.73,82.55) 125.793,82.486 129.603,82.486 P4.2 131.445,80.645 v1@146.431,80.645 ; v1(146.431,80.656) v1@146.431,80.645 ; P3.2 v1(150.622,82.423) 148.844,80.645 v1@146.431,80.645
XB_DIN: "Wireless Transceiver.3" "XB DIO.1" | length 6
  Bottom Layer w0.4: 54.356,107.188 54.661,107.493 59.995,107.493 ; 59.881,107.315 60.071,107.505
XB_DOUT: "Wireless Transceiver.2" "XB DIO.2" | length 5.9
  Bottom Layer w0.4: 54.356,109.728 54.47,109.614 59.88,109.614 59.995,109.499 ; 59.975,109.601 60.071,109.505
XRESET: "Wireless Transceiver.5" C19.1 R4.1 TB2.2 TB2.4 | length 22.3
  Top Layer w0.4: v1(52.451,103.378) 54.538,103.378 TB2.4 ; R4.1 54.677,93.212 TB2.2 TB2.4 ; v1(57.277,103.505) 54.69,103.505 TB2.4
  Bottom Layer w0.4: v1(52.451,103.378) 53.898,101.931 C19.1 ; v1(57.277,103.505) 57.29,103.492 59.982,103.492 59.995,103.48
XTAL1: C5.1 MCU.8 XT1.2 | length 18
  Top Layer w0.4: C5.1 76.258,65.805 79.781,65.805 80.256,66.28 80.256,67.81 85.776,73.33 87.376,73.33 MCU.8
XTAL2: C4.1 MCU.7 XT1.1 | length 18.2
  Top Layer w0.4: C4.1 73.359,71.101 80.044,71.101 XT1.1 81.471,71.075 84.526,74.13 MCU.7
pads on no net: "USB PWR.2" "USB PWR.3" "USB PWR.4" "USB PWR.6" "Wireless Transceiver.6" "Wireless Transceiver.7" "Wireless Transceiver.8" "Wireless Transceiver.9" "Wireless Transceiver.12" "Wireless Transceiver.14" "Wireless Transceiver.15" "Wireless Transceiver.16" "Wireless Transceiver.20" Humidity.4 JT1.6 JT1.7 JT1.8 MCU.14 MCU.15 MCU.16 MCU.25 MCU.26 MCU.41 MCU.42 Temperature.1 VR1.4 VR2.4

## Polygon pours and split planes (outlines as drawn)
GND on Bottom Layer "Top Layer-No Net" (solid, remove dead copper, pour order 0): 40,40.27 40,124.73 cw(c41.27,124.73) 41.27,126 169.73,126 cw(c169.73,124.73) 171,124.73 171,40.27 cw(c169.73,40.27) 169.73,39 41.27,39 cw(c41.27,40.27)
GND on Top Layer "Top Layer-GND" (solid, remove dead copper, pour order 1): 40,40.27 40,124.73 cw(c41.27,124.73) 41.27,126 169.73,126 cw(c169.73,124.73) 171,124.73 171,40.27 cw(c169.73,40.27) 169.73,39 41.27,39 cw(c41.27,40.27)

## Keep-outs
Keep-Out Layer:
  lines w2: 40,40.27 ccw(c41.27,40.27) 41.27,39 169.73,39 ccw(c169.73,40.27) 171,40.27 171,124.73 ccw(c169.73,124.73) 169.73,126 41.27,126 ccw(c41.27,124.73) 40,124.73 40,120 40,40.27